# EAGLE board HeaterControlPlusPIC (EAGLE 7.5.0)
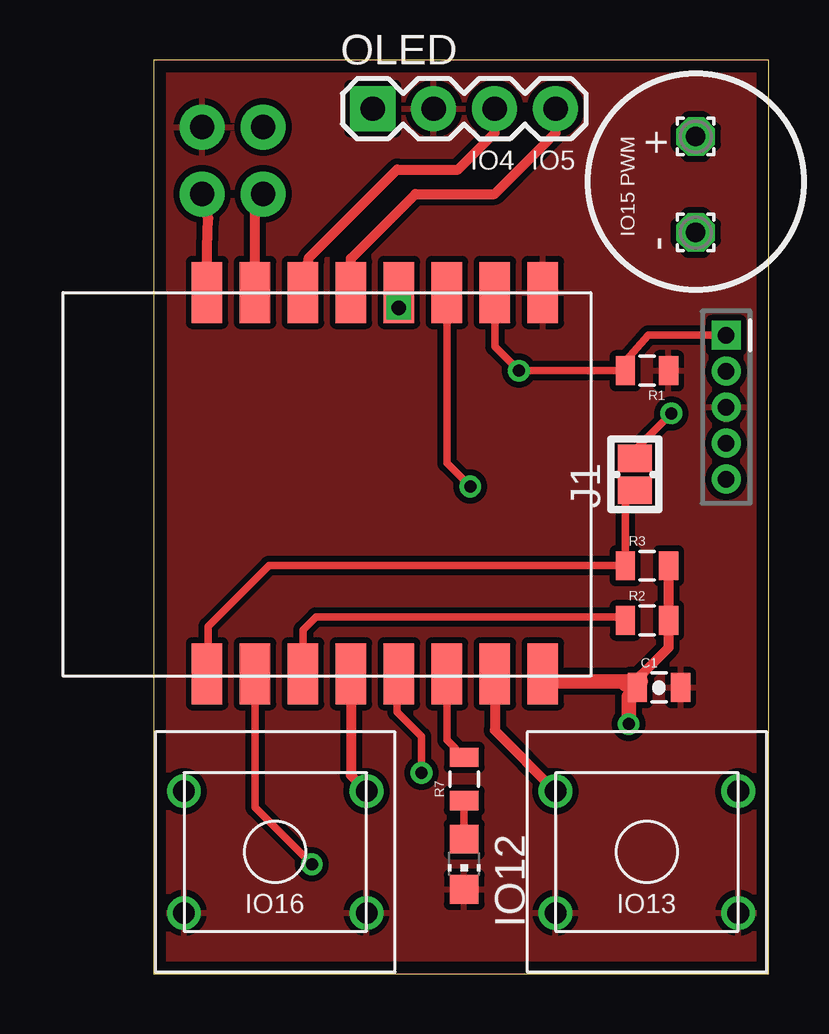
[diagram p0: board, top side]
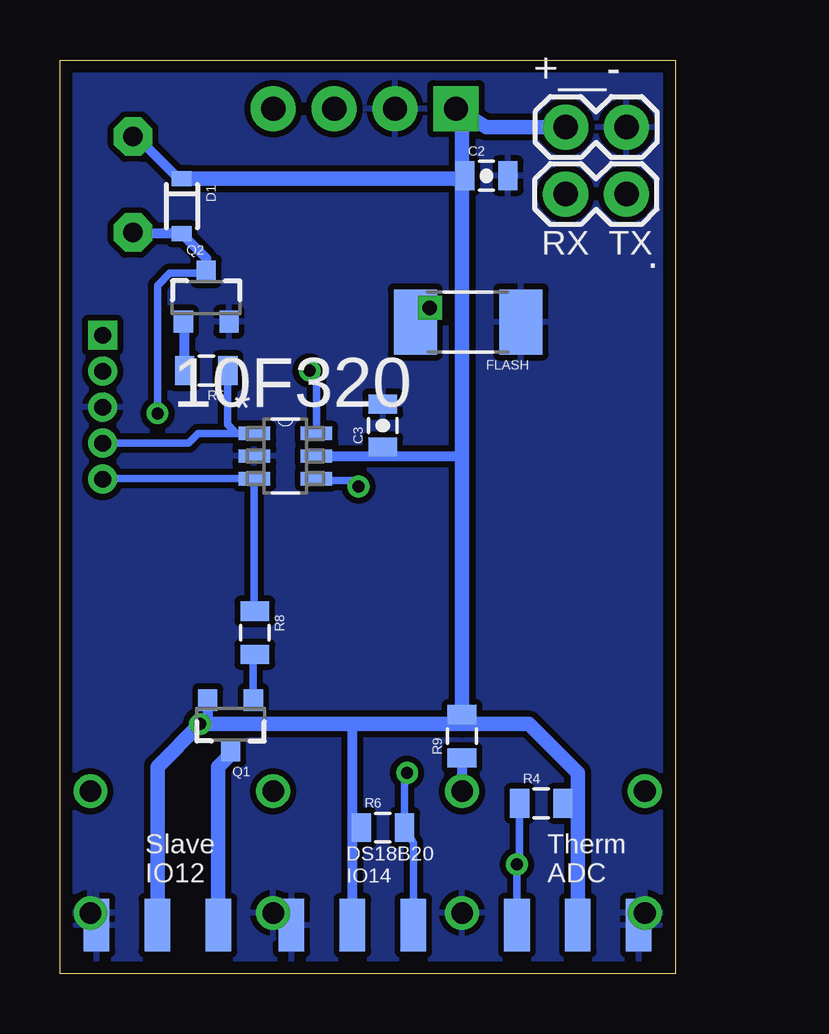
[diagram p1: board, bottom side, seen from below]

Size 25.65 x 38.1 mm. Coordinates in mm from the lower left corner, seen from the top.
Outline: 25.65,0 25.65,38.1 0,38.1 0,0 25.65,0
Copper layers (1*16): Top 0.035mm / dielectric 1.5mm / Bottom 0.035mm
Design rules "default *": minimum track width 10mil, minimum drill 24mil, track to track 8mil, track to pad 8mil, pad to pad 8mil, via to via 8mil, smd to smd 8mil, copper to edge 20mil, drill to drill 8mil, minimum pad ring 10mil, minimum via ring 8mil, stop-mask expansion 4mil, vias tented up to drill 0mil, thermal gap 10mil

## Footprints (pad centres in the part's own frame; a part is rotated, then mirrored left to right if it is on the bottom)
SOT95P270X145-6N = smd 1.321 x 0.559: 1 -1.295,0.94; 2 -1.295,0; 3 -1.295,-0.94; 4 1.295,-0.94; 5 1.295,0; 6 1.295,0.94
1,6/0,8 = drill 0.813 pad 1.6 octagon: 1 0,0
1X02 = drill 1.016 pad 1.88: 1 0,0; 2 2.54,0
0805-CAP = smd 0.8 x 1.2: 1 -0.9,0; 2 0.9,0
SOD-323 = smd 0.63 x 0.83: A 1.15,0; C -1.15,0
BTN_4MM = smd 1.8 x 2.7: 1 -2.2,0; 2 2.2,0
CHIP-LED0805 = smd 1.2 x 1.2: A 0,-1.05; C 0,1.05
JUMPER_SOLDER_1X2 = smd 1.143 x 1.422: 1 -0.66,0; 2 0.66,0
OMROM_TH = drill 0.9: P1 -3.81,2.54; P2 -3.81,-2.54; P3 3.81,2.54; P4 3.81,-2.54
1X04 = drill 1.016 pad 1.88 square: 1 0,0 | drill 1.016 pad 1.88: 2 2.54,0; 3 5.08,0; 4 7.62,0
SOT23-3 = smd 0.8 x 0.9: 1 -0.95,-1; 2 0.95,-1; 3 0,1.1
0805 = smd 0.8 x 1.2: 1 -0.9,0; 2 0.9,0
ESP-07/12 = smd 2.54 x 1.27: ADC 0.1,14; CH_PD 0.1,12; GND 16,2; GPIO0 16,8; GPIO2 16,6; GPIO4 16,12; GPIO5 16,10; GPIO12 0.1,6; GPIO13 0.1,4; GPIO14 0.1,8; GPIO15 16,4; GPIO16 0.1,10; REST 0.1,16; RXD 16,14; TXD 16,16; VCC 0.1,2
SMD-PAD1 = smd 2.184 x 1.067: >NAME 0,0
PIC-ICSP-MINI = drill 0.7 square: 1 -3,0 | drill 0.7: 2 -1.5,0; 3 0,0; 4 1.5,0; 5 3,0

## Placement (x,y rotation side)
10F320  PIC10F320T-I/OT  [SOT95P270X145-6N]  16.26,21.59 0 bottom
+  [1,6/0,8]  22.61,34.91 90 top
+__-  [1X02]  4.57,35.31 0 bottom
-  [1,6/0,8]  22.61,30.91 90 top
.  [1X02]  2.03,32.51 180 bottom
C1  0.1uF  [0805-CAP]  21.08,11.94 0 top
C2  0.1uF  [0805-CAP]  7.87,33.27 0 bottom
C3  0.1uF  [0805-CAP]  12.19,22.86 90 bottom
D1  250mA/100V  [SOD-323]  20.57,32 270 bottom
FLASH  BTN_4MM  [BTN_4MM]  8.64,27.18 180 bottom
IO12  [CHIP-LED0805]  12.95,4.57 180 top
J1  JUMPER_SOLDER_1X2  [JUMPER_SOLDER_1X2]  20.07,20.83 90 top
LEFT  OMROM_TH  [OMROM_TH]  5.08,5.08 0 top
OLED  [1X04]  9.14,36.07 0 top
Q1  P-FET  [SOT23-3]  18.54,10.41 180 bottom
Q2  [SOT23-3]  19.56,28.19 0 bottom
R1  10K  [0805]  20.57,25.15 180 top
R2  10K  [0805]  20.57,14.73 0 top
R3  10K  [0805]  20.57,17.02 0 top
R4  10K  [0805]  5.59,7.11 0 bottom
R5  1K  [0805]  19.56,25.15 180 bottom
R6  4K7  [0805]  12.19,6.1 0 bottom
R7  330  [0805]  12.95,8.13 90 top
R8  10K  [0805]  17.53,14.22 270 bottom
R9  10K  [0805]  8.89,9.91 90 bottom
RIGHT  OMROM_TH  [OMROM_TH]  20.57,5.08 0 top
U$1  ESP-07/12  [ESP-07/12]  18.23,12.41 90 top
U$2  SMD-PAD1  [SMD-PAD1]  19.05,2.03 270 bottom
U$3  SMD-PAD1  [SMD-PAD1]  21.59,2.03 270 bottom
U$4  SMD-PAD1  [SMD-PAD1]  4.06,2.03 270 bottom
U$5  SMD-PAD1  [SMD-PAD1]  1.52,2.03 270 bottom
U$6  SMD-PAD1  [SMD-PAD1]  24.13,2.03 270 bottom
U$7  SMD-PAD1  [SMD-PAD1]  6.6,2.03 270 bottom
U$8  SMD-PAD1  [SMD-PAD1]  13.46,2.03 90 bottom
U$9  PIC-ICSP-MINI  [PIC-ICSP-MINI]  23.88,23.62 270 top
U$10  SMD-PAD1  [SMD-PAD1]  10.92,2.03 270 bottom
U$11  SMD-PAD1  [SMD-PAD1]  16,2.03 270 bottom

## Library data of the parts
10F320 = Microchip_By_element14_Batch_1; MPN: PIC10F220T-I/OT; OC_FARNELL: 1332175; OC_NEWARK: 31K4981; PACKAGE: SOT-6; SUPPLIER: Microchip
+ - = wirepad
+__- . OLED U$9 = SparkFun-Connectors
C1-C3 = SparkFun-Capacitors
D1 = SparkFun-DiscreteSemi; PROD_ID: DIO-09646
FLASH LEFT RIGHT U$2-U$8 U$10 U$11 = CuriousTech
IO12 = led
J1 = dp_devices
Q1 = SparkFun-DiscreteSemi
Q2 = SparkFun-DiscreteSemi; PROD_ID: TRANS-08049
R1-R9 = SparkFun-Resistors
U$1 = ESP-07_12

## Nets
3V3: 10F320.5 +.1 +__-.1 C1.1 C2.1 C3.1 D1.C OLED.1 Q1.2 R2.2 R3.2 R4.2 R6.1 R9.2 U$1.VCC U$3.>NAME U$4.>NAME U$8.>NAME
ADC: R4.1 U$1.ADC U$7.>NAME
GND: 10F320.2 +__-.2 C1.2 C2.2 C3.2 FLASH.1 IO12.C LEFT.P2 LEFT.P4 OLED.2 Q2.2 R1.1 RIGHT.P2 RIGHT.P4 U$1.GND U$5.>NAME U$6.>NAME U$9.3 U$11.>NAME
HEAT: Q1.1 R8.2
ICSPCLK: 10F320.3 R8.1 U$9.5
IO0: FLASH.2 U$1.GPIO0
IO2: 10F320.4 U$1.GPIO2
IO12: R7.2 U$1.GPIO12
IO13: RIGHT.P1 U$1.GPIO13
IO14: R6.2 U$1.GPIO14 U$10.>NAME
IO15: 10F320.6 R1.2 U$1.GPIO15 U$9.1
IO16: LEFT.P3 R9.1 U$1.GPIO16
N$1: Q1.3 U$2.>NAME
N$2: Q2.1 R5.2
N$3: OLED.3 U$1.GPIO4
N$4: -.1 D1.A J1.2 Q2.3
N$5: IO12.A R7.1
N$9: OLED.4 U$1.GPIO5
N$11: R2.1 U$1.CH_PD
PICPWM: 10F320.1 R5.1 U$9.4
REST: J1.1 R3.1 U$1.REST
RXD: ..2 U$1.RXD
TXD: ..1 U$1.TXD

## Tracks (layer width: path | path; a pad name or v marks a point on that pad's centre or on a via)
3V3  (via drill 0.5)
  Top 0.406: 20.32,12.19 20.32,12.45 21.47,13.6 R2.2 R3.2
  Top 0.61: U$1.VCC 16.26,12.54 16.26,12.19 20.32,12.19 19.67,12.08 C1.1 19.81,11.57 v19.81,10.41
  Bottom 0.305: C2.1 8.89,33.27 | C3.1 12.19,21.59 | R6.1 13.46,5.84 | R4.2 4.06,7.11
  Bottom 0.406: Q1.2 19.49,10.73 19.56,10.41 | +.1 22.61,34.81 22.35,34.8 20.71,33.15 20.44,33.15 20.7,33.15 D1.C | U$8.>NAME 13.46,5.84 13.46,10.41 | 10F320.5 12.19,21.59 8.89,21.59
  Bottom 0.61: +__-.1 7.87,35.31 OLED.1 8.89,35.56 8.89,33.27 8.89,33.02 | U$3.>NAME 21.59,8.64 v19.81,10.41 19.56,10.41 13.46,10.41 8.89,10.41 | U$4.>NAME 4.06,7.11 4.06,8.38 6.1,10.41 8.89,10.41 | 8.89,33.02 8.89,21.59 R9.2 8.89,10.41 | 20.71,33.15 9.28,33.15 8.89,33.02
ADC  (via drill 0.5)
  Top 0.305: v6.6,4.57 4.23,6.95 U$1.ADC
  Bottom 0.305: U$7.>NAME v6.6,4.57 6.49,4.69 R4.1
GND
  Bottom 0.406: U$6.>NAME 24.13,2.29 RIGHT.P4 | LEFT.P2 1.27,2.29 U$5.>NAME
  pour Top (isolate 0.254): 0,0 0,38.1 25.65,38.1 25.65,0
  pour Bottom (isolate 0.254): 25.65,0 0,0 0,38.1 25.65,38.1
HEAT
  Bottom 0.305: R8.2 17.59,13.32 Q1.1
ICSPCLK
  Bottom 0.305: U$9.5 23.85,20.65 10F320.3 17.55,15.12 R8.1
IO0  (via drill 0.6)
  Top 0.305: U$1.GPIO0 v10.23,27.77
  Bottom 0.406: v10.23,27.77 10.48,27.02 FLASH.2
IO2  (via drill 0.5)
  Top 0.305: U$1.GPIO2 12.23,21.3 v13.21,20.32
  Bottom 0.305: v13.21,20.32 13.46,20.57 14.33,20.57 10F320.4
IO12
  Top 0.305: U$1.GPIO12 12.23,9.75 R7.2
  Top 0.61: 12.19,13.21 12.19,12.55 U$1.GPIO12
IO13
  Top 0.406: U$1.GPIO13 14.23,10.15 RIGHT.P1
IO14  (via drill 0.5)
  Top 0.305: v11.18,8.38 11.18,9.91 10.16,10.92 10.16,12.44
  Top 0.406: 10.16,12.44 U$1.GPIO14
  Bottom 0.305: U$10.>NAME 10.92,5.47 R6.2 11.29,8.27 v11.18,8.38
IO15  (via drill 0.5)
  Top 0.305: U$1.GPIO15 14.23,26.16 v15.24,25.15 R1.2 19.67,25.28 19.56,25.4 20.64,26.62 U$9.1
  Bottom 0.305: 10F320.6 14.96,24.87 v15.24,25.15
IO16
  Top 0.406: U$1.GPIO16 8.23,8.28 LEFT.P3
  Bottom 0.406: R9.1 LEFT.P3
N$1
  Bottom 0.406: 18.54,9.14 Q1.3
  Bottom 0.61: U$2.>NAME 19.05,8.64 18.54,9.14
N$2
  Bottom 0.406: R5.2 20.46,27.14 Q2.1
N$3
  Top 0.406: U$1.GPIO4 6.48,29.85 10.16,33.53 12.7,33.53 14.22,35.05 OLED.3
N$4  (via drill 0.5)
  Top 0.305: J1.2 20.07,21.84 v21.59,23.37
  Bottom 0.305: v21.59,23.37 21.59,28.7 21.08,29.21 19.64,29.21 Q2.3
  Bottom 0.406: -.1 22.61,30.85 D1.A 19.56,29.84 Q2.3
N$5
  Top 0.305: R7.1 IO12.A
N$9
  Top 0.406: U$1.GPIO5 8.23,29.82 10.92,32.51 14.22,32.51 16.76,35.05 OLED.4
N$11
  Top 0.305: U$1.CH_PD 6.23,14.33 6.78,14.88 19.53,14.88 R2.1
  Top 0.406: 6.29,12.51 U$1.CH_PD
PICPWM
  Bottom 0.305: U$9.4 20.3,22.12 19.89,22.53 18.29,22.53 | 10F320.1 18.29,22.53 | R5.1 18.66,22.9 18.29,22.53
REST
  Top 0.305: 2.26,13.16 2.29,13.19 2.29,14.48 4.83,17.02 R3.1 19.67,19.78 J1.1
  Top 0.406: 2.26,13.16 2.32,12.71 2.23,12.71 U$1.REST | U$1.REST 2.23,13.43 | U$1.REST 2.23,12.41
RXD
  Top 0.406: U$1.RXD 4.23,32.09 ..2
TXD
  Top 0.406: U$1.TXD 2.23,30.28 2.29,31.5 ..1

## Text on the board
tPlace: IO4 | IO5 | IO15 PWM | IO16 | IO13
bPlace: RX TX | Therm / ADC | DS18B20 / IO14 | Slave / IO12
tStop: ESP-07/12
bStop: CuriousTech.net / Waterbed Heater